# EAGLE board psupply2 (EAGLE 6.5.0)
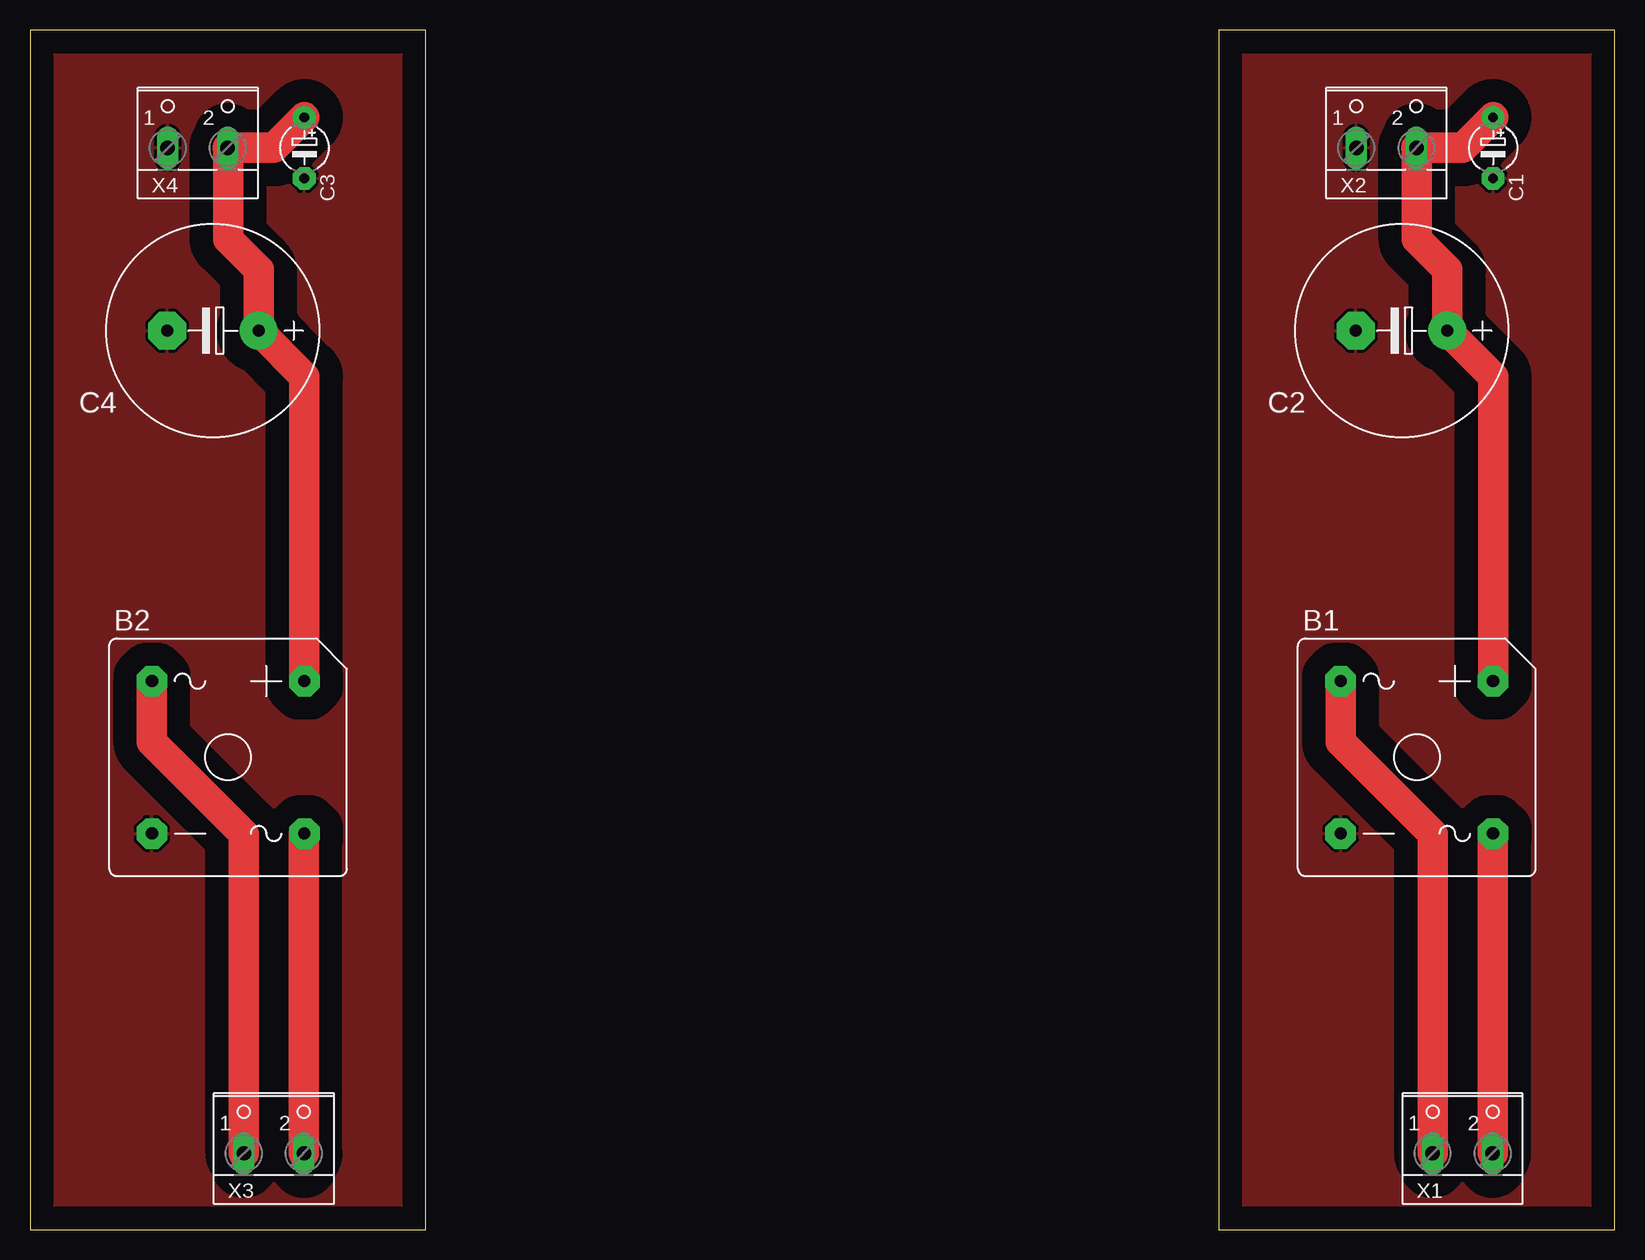
[diagram p0: board, top side]

Size 132.06 x 100 mm. Coordinates in mm from the lower left corner, seen from the top.
Outline: 99.06,0 132.06,0 132.06,100 99.06,100 99.06,0
Outline: 0,0 33,0 33,100 0,100 0,0
Copper layers (1*16): Top 0.035mm / dielectric 1.5mm / Bottom 0.035mm
Design rules "default": minimum track width 10mil, minimum drill 24mil, track to track 8mil, track to pad 8mil, pad to pad 8mil, via to via 8mil, smd to smd 8mil, copper to edge 40mil, drill to drill 8mil, minimum pad ring 10mil, minimum via ring 8mil, stop-mask expansion 4mil, vias tented up to drill 0mil, thermal gap 10mil

## Footprints (pad centres in the part's own frame; a part is rotated, then mirrored left to right if it is on the bottom)
GBPC80X = drill 1.016 pad 2.54 octagon: + 6.35,6.35; - -6.35,-6.35; AC1 -6.35,6.35; AC2 6.35,-6.35
E5-4 = drill 0.813 pad 1.905: + -2.54,0 | drill 0.813 pad 1.905 octagon: - 2.54,0
E7,5-18 = drill 1.016 pad 3.15: + -3.81,0 | drill 1.016 pad 3.15 octagon: - 3.81,0
W237-102 = drill 1.194 long: 1 -2.5,-1.27; 2 2.5,-1.27

## Placement (x,y rotation side)
B1  [GBPC80X]  115.57,39.37 0 top
B2  [GBPC80X]  16.51,39.37 0 top
C1  [E5-4]  121.92,90.17 270 top
C2  [E7,5-18]  114.3,74.93 180 top
C3  [E5-4]  22.86,90.17 270 top
C4  [E7,5-18]  15.24,74.93 180 top
X1  [W237-102]  119.38,7.62 0 top
X2  [W237-102]  113.03,91.44 0 top
X3  [W237-102]  20.32,7.62 0 top
X4  [W237-102]  13.97,91.44 0 top

## Library data of the parts
B1 B2 = rectifier
C1-C4 = rcl
X1-X4 = con-wago-500; MPN: 237-102; OC_FARNELL: unknown; OC_NEWARK: 70K9898

## Nets
GND: B1.- C1.- C2.- X2.1
GND1: B2.- C3.- C4.- X4.1
N$1: B1.AC1 X1.1
N$2: B1.AC2 X1.2
N$3: B1.+ C1.+ C2.+ X2.2
N$4: B2.AC1 X3.1
N$5: B2.AC2 X3.2
N$6: B2.+ C3.+ C4.+ X4.2

## Tracks (layer width: path | path; a pad name or v marks a point on that pad's centre or on a via)
GND
  pour Top (isolate 1.93): 99.06,100.33 99.06,0 132.08,0 132.08,100.33
GND1
  pour Top (isolate 1.93): 0,100.33 0,0 33.02,0 33.02,100.33
N$1
  Top 2.54: X1.1 116.88,32.98 109.22,40.64 B1.AC1
N$2
  Top 2.54: X1.2 121.88,32.98 B1.AC2
N$3
  Top 2.54: C1.+ 119.38,90.17 X2.2 115.57,90.13 115.57,82.55 118.11,80.01 C2.+ 121.92,71.12 B1.+
N$4
  Top 2.54: X3.1 17.82,32.98 10.16,40.64 B2.AC1
N$5
  Top 2.54: X3.2 22.82,32.98 B2.AC2
N$6
  Top 2.54: C3.+ 20.32,90.17 X4.2 16.51,90.13 16.51,82.55 19.05,80.01 C4.+ 22.86,71.12 B2.+